# Altium PCB Powerboard.PcbDoc (part 1 of 2)
Units mm, origin at the board's own origin, x right, y up, seen from the top; angles counter-clockwise.
Board outline 74 x 33 mm, 4 copper layers (Top Layer, Layer 1, Layer 2, Bottom Layer), stack 1.17 mm thick; 86 components, 35 nets, 205 pads, 352 vias.
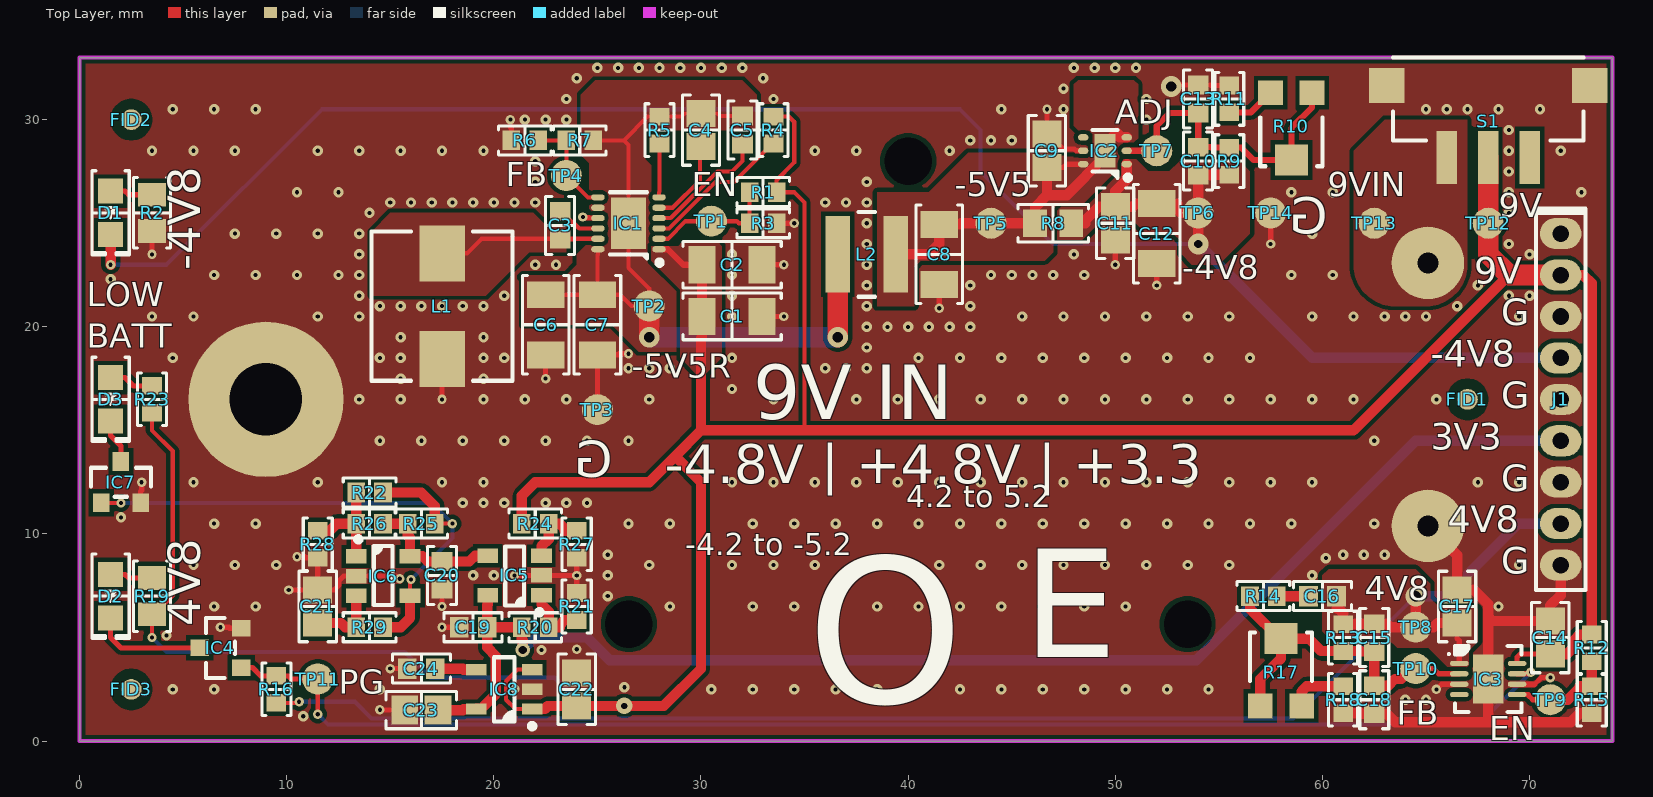
[diagram p0: Top Layer view]
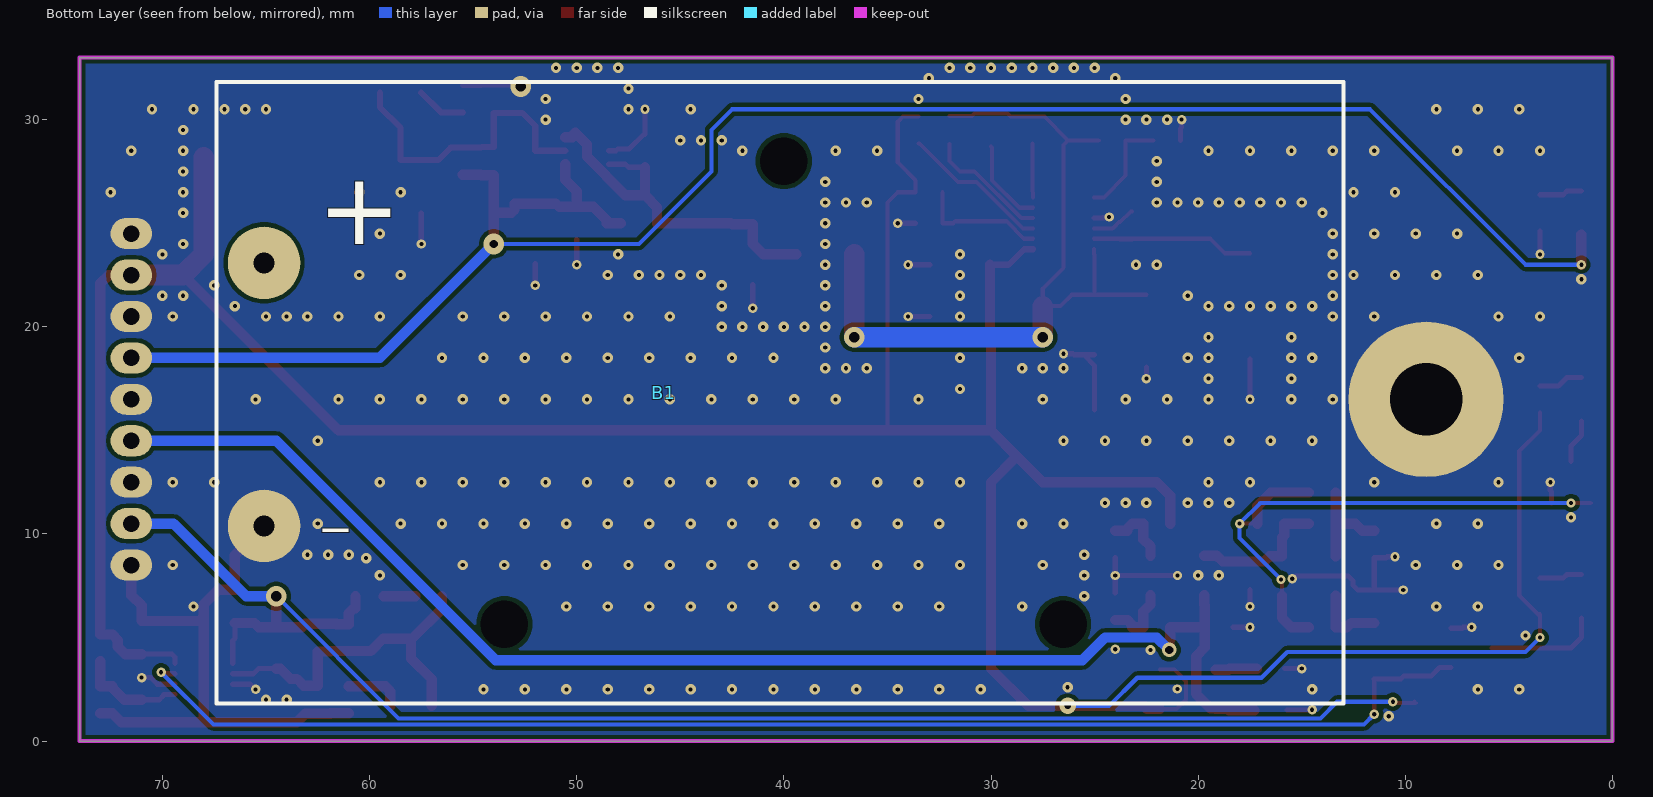
[diagram p1: Bottom Layer view, seen from below]
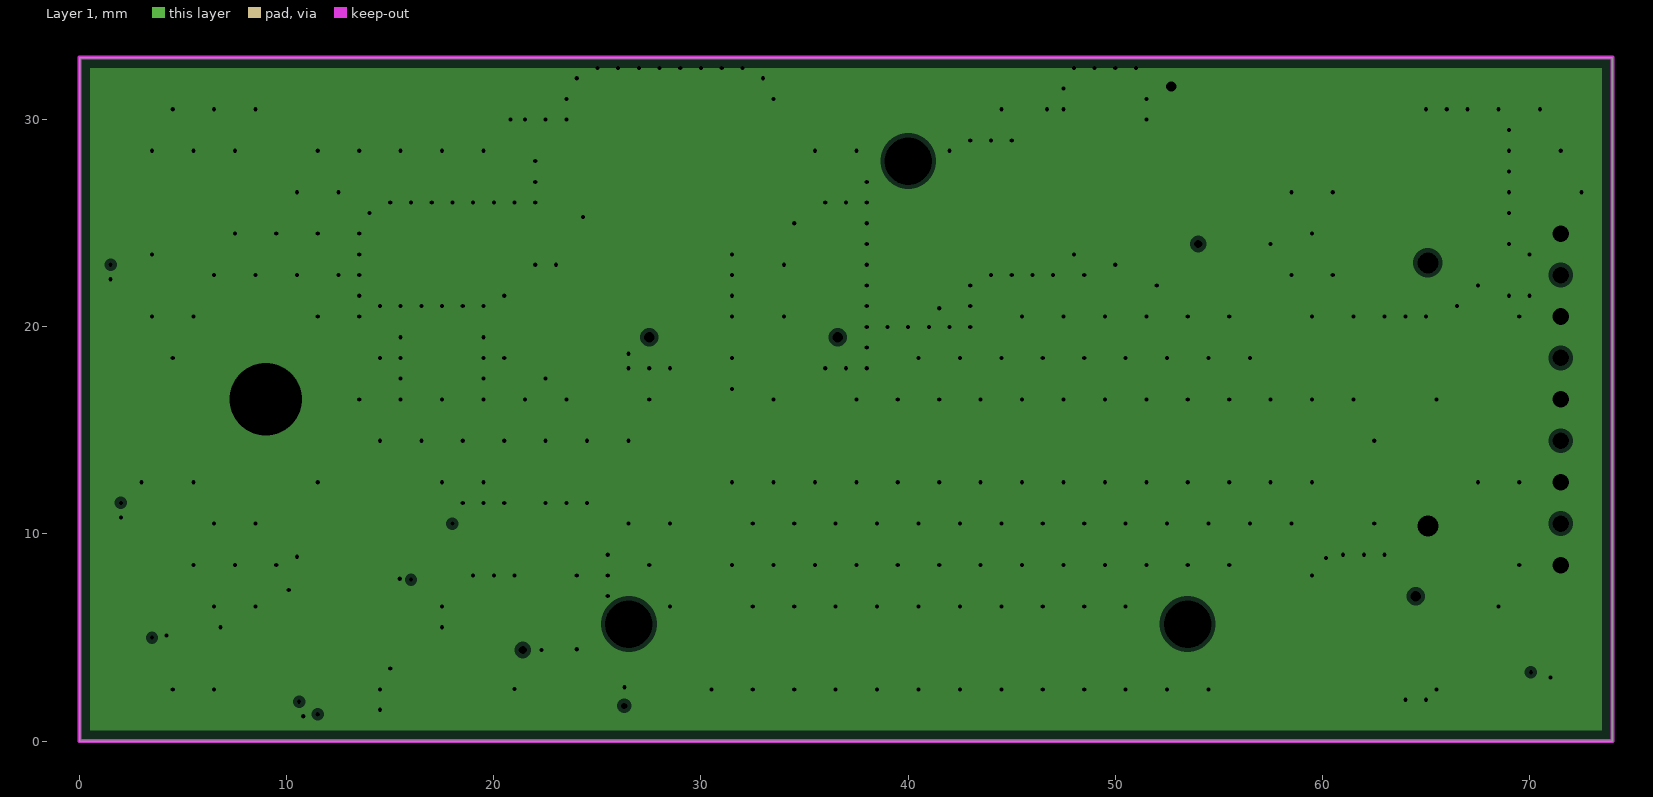
[diagram p2: Layer 1, clearances drawn from the general rule]
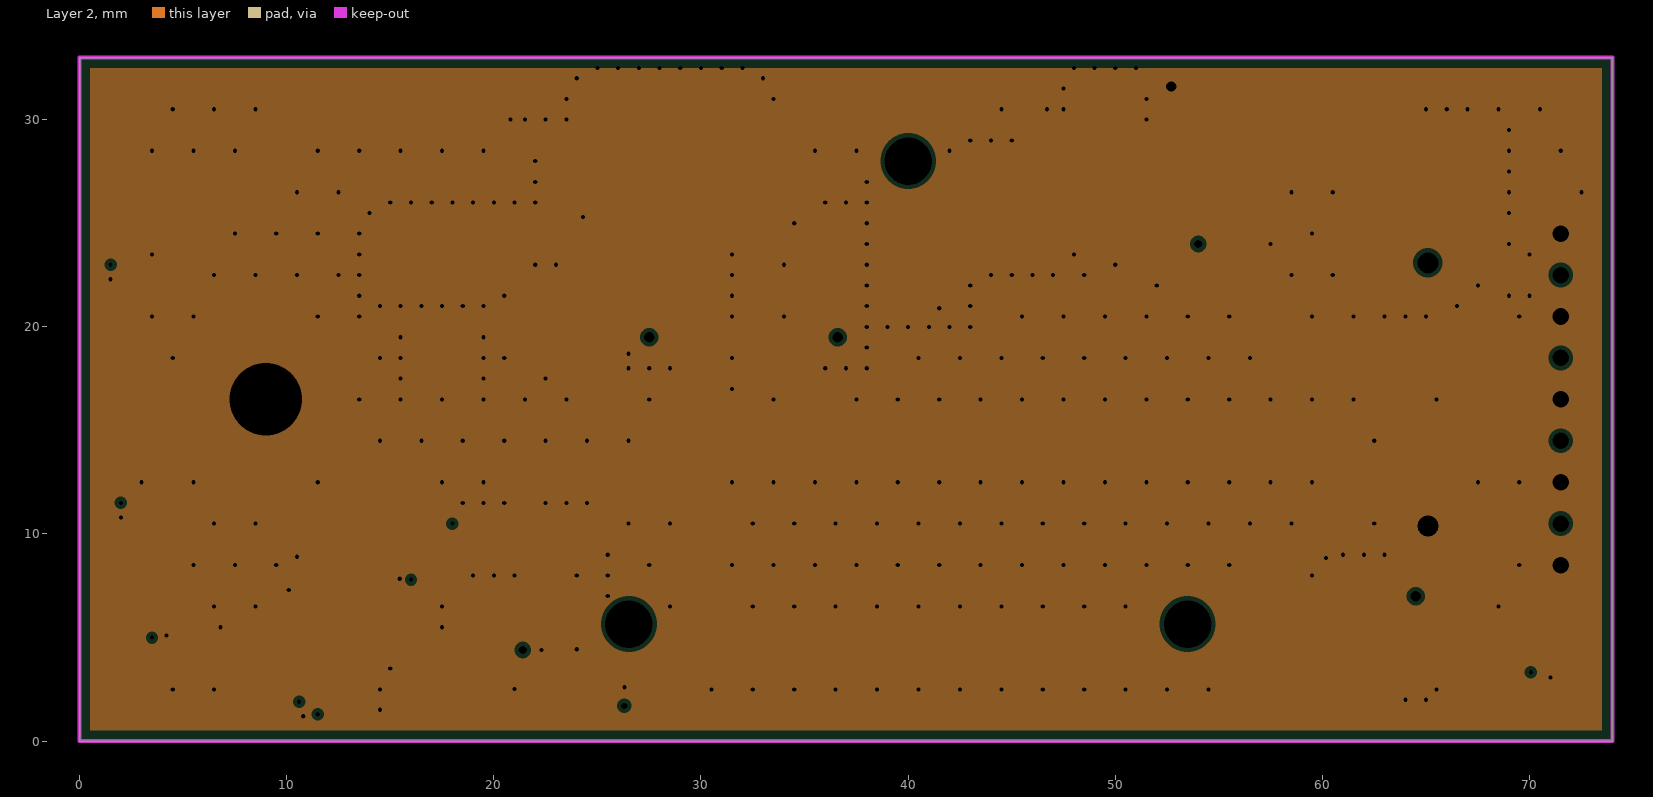
[diagram p3: Layer 2, clearances drawn from the general rule]
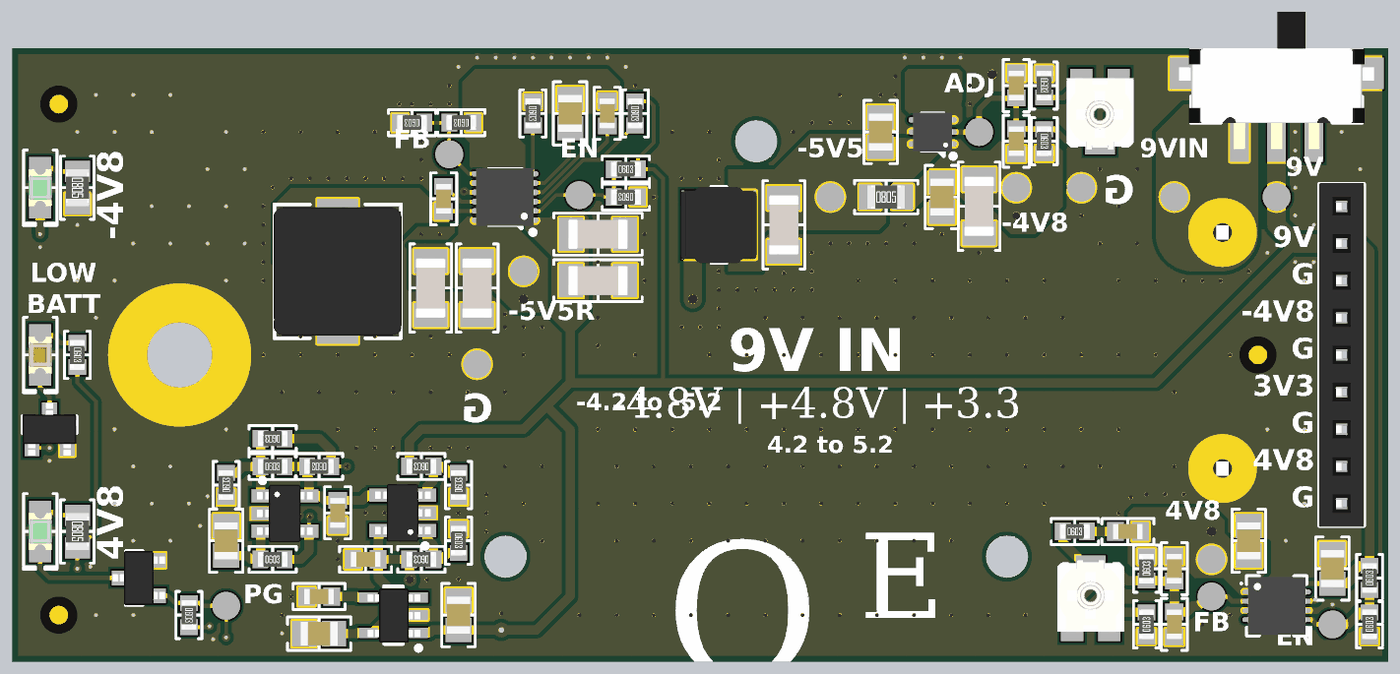
[diagram p4: 3D render of the assembled board from above, using the file's embedded part models]

## Layer stack, top to bottom
Top Solder: solder mask 0.0102, Solder Resist, Dk 3.5
Top Layer: signal copper 0.035
Prepreg1: prepreg 0.2, PP-006, Dk 4.6
Layer 1: plane copper 0.0175, net GND
Core: dielectric 0.665, FR-4, Dk 4.6
Layer 2: plane copper 0.0175, net GND
Prepreg2: prepreg 0.2, PP-006, Dk 4.6
Bottom Layer: signal copper 0.035
Bottom Solder: solder mask 0.0102, Solder Resist, Dk 3.5

## Board outline
0,0 0,33 74,33 74,0

## Design rules (kind name [scope] priority, off if disabled: settings)
BoardOutlineClearance [All] p1: gap=0.25 ignorepadtopadclearanceinfootprint=FALSE
Clearance "Clearance GND Poly" [InPolygon] p1: gap=0.2 ignorepadtopadclearanceinfootprint=TRUE
Clearance [All] p2: gap=0.09 ignorepadtopadclearanceinfootprint=FALSE
HoleSize [All] p1: absolutevalues=TRUE maxlimit=5 minlimit=0.2 maxpercent=80.000 minpercent=20.000
MinimumAnnularRing [All] p1: minimumring=0.125
MinimumSolderMaskSliver [All] p1: minsoldermaskwidth=0
PlaneClearance [All] p1: clearance=0.2
PlaneConnect [All] p1: planeconnectstyle=Direct reliefexpansion=0.508 reliefentries=4 reliefconductorwidth=0.254 reliefairgap=0.254
PolygonConnect [All] p1: connectstyle=Direct reliefconductorwidth=0.254 reliefentries=4 polygonreliefangle="90 Angle" airgapwidth=0.254
RoutingVias [All] p1: holewidth=0.35 width=0.65 viastyle="Through Hole" minholewidth=0.2 minwidth=0.45 maxholewidth=4 maxwidth=6.35
SMDEntry [All] p1: side=TRUE corner=TRUE anyangle=FALSE
SMDToCorner [All] p1: distance=39370
SilkToSilkClearance [All] p1: silktosilkclearance=-10
SolderMaskExpansion "SolderMask Via" [IsVia] p1: expansion=0.102 istentingtop=TRUE
SolderMaskExpansion [All] p2: expansion=0.102 istentingtop=FALSE
UnRoutedNet [All] p1: checkbadconnections=TRUE
Width [All] p1: maxlimit=3 minlimit=0.09 preferedwidth=0.2
24 further rules are at their usual default settings.

## Classes and differential pairs
component class Powersupply: B1 C19 C20 C21 C22 C23 C24 D3 FID1 FID2 FID3 IC5 IC6 IC7 IC8 J1 R20 R21 R22 R23 R24 R25 R26 R27 R28 R29 S1 TP12 TP13 TP14
component class PositiveRegulator: C14 C15 C16 C17 C18 D2 IC3 IC4 R12 R13 R14 R15 R16 R17 R18 R19 TP8 TP9 TP10 TP11
component class NegativeRegulator: C1 C2 C3 C4 C5 C6 C7 C8 C9 C10 C11 C12 C13 D1 IC1 IC2 L1 L2 R1 R2 R3 R4 R5 R6 R7 R8 R9 R10 R11 TP1 TP2 TP3 TP4 TP5 TP6 TP7

## Components (designator, comment, footprint, x,y, rotation, side; value= is the part's Value field where it differs from the comment)
B1 "BH9VPC" "MPD BH9VPC" 40.003,16.825 r180 bottom locked
C1 "10 µF" "CAP 1206_3216 - 0.8MM" 31.5,20.5 r180 top
C2 "1.5 µF" "CAP 1206_3216 - 0.8MM" 31.5,23 r180 top
C3 "0.1 µF" "CAP 0603_1608" 23.2,24.9 r90 top
C4 "2.2 µF" "CAP 0805_2012" 30,29.5 r270 top
C5 "5600 pF" "CAP 0603_1608" 32,29.5 r270 top
C6 "10 µF" "CAP 1206_3216 - 0.8MM" 22.5,20.1 r270 top
C7 "10 µF" "CAP 1206_3216 - 0.8MM" 25,20.1 r270 top
C8 "10 µF" "CAP 1206_3216 - 0.8MM" 41.5,23.5 r90 top
C9 "2.2 µF" "CAP 0805_2012" 46.7,28.5 r270 top
C10 "220 pF" "CAP 0603_1608" 54,28 r270 top
C11 "2.2 µF" "CAP 0805_2012" 50,25 r90 top
C12 "10 µF" "CAP 1206_3216 - 0.8MM" 52,24.5 r90 top
C13 "220 pF" "CAP 0603_1608" 54,31 r270 top
C14 "2.2 µF" "CAP 0805_2012" 71,5 r270 top
C15 "220 pF" "CAP 0603_1608" 62.5,5 r90 top
C16 "0.1 µF" "CAP 0603_1608" 60,7 r0 top
C17 "2.2 µF" "CAP 0805_2012" 66.5,6.5 r270 top
C18 "220 pF" "CAP 0603_1608" 62.5,2 r90 top
C19 "0.1 µF" "CAP 0603_1608" 19,5.5 r0 top
C20 "0.1 µF" "CAP 0603_1608" 17.5,8 r90 top
C21 "6.8 µF" "CAP 0805_2012" 11.5,6.5 r270 top
C22 "2.2 µF" "CAP 0805_2012" 24,2.5 r270 top
C23 "2.2 µF" "CAP 0805_2012" 16.5,1.5 r0 top
C24 "10000 pF" "CAP 0603_1608" 16.5,3.5 r0 top
D1 "Green" "LED 0805_2012 GREEN" 1.5,25.5 r270 top
D2 "Green" "LED 0805_2012 GREEN" 1.5,7 r270 top
D3 "Red" "LED 0805_2012 RED" 1.5,16.5 r270 top
FID1 "Fiducial" Fiducial-1mm 67,16.5 r90 top
FID2 "Fiducial" Fiducial-1mm 2.5,30 r90 top
FID3 "Fiducial" Fiducial-1mm 2.5,2.5 r90 top
IC1 "MAX17578ATC+" "MAXIM TDFN-12 3X3MM TD1233+1" 26.5,25 r180 top
IC2 "ADP7182ACPZN-R7" "AD LFCSP-6 2X2MM CP-6-3" 49.5,28.5 r180 top
IC3 "ADP7102ACPZ-R7" "AD LFCSP-8 3x3MM CP-8-5" 68,3 r0 top
IC4 "DMN2056U-7" "DIODES SOT-23-3" 6.8,4.5 r180 top
IC5 "AZV321KTR-G1" "DIODES SOT-23-5 K" 21,8 r180 top
IC6 "AZV321KTR-G1" "DIODES SOT-23-5 K" 14.656,7.967 r0 top
IC7 "DMN2056U-7" "DIODES SOT-23-3" 2,12.5 r90 top
IC8 "LP2985IM5X-3.3/NOPB" "TI SOT-23-5 DBV" 20.5,2.5 r180 top
J1 "NPPN091BFCN-RC" "SULLINS NPPN091BFCN" 71.5,16.5 r270 top
L1 "4.7 µH" "WURTH WE-HCI 7040" 17.5,21 r270 top
L2 "10 µH" "TAIYO YUDEN NR4018" 38,23.5 r0 top
R1 "3.32 MOhms" "RES 0603_1608" 33,26.5 r0 top
R2 "390 Ohms" "RES 0805_2012" 3.5,25.5 r270 top
R3 "845 kOhms" "RES 0603_1608" 33,25 r180 top
R4 "10 kOhms" "RES 0603_1608" 33.5,29.5 r270 top
R5 "23.7 kOhms" "RES 0603_1608" 28,29.5 r270 top
R6 "66.5 kOhms" "RES 0603_1608" 21.5,29 r180 top
R7 "13 kOhms" "RES 0603_1608" 24.15,29 r180 top
R8 "0 Ohms" "RES 0805_2012" 47,25 r0 top
R9 "294 kOhms" "RES 0603_1608" 55.5,28 r270 top
R10 "30 kOhms" "POT BOURNS TRIMPOT TC33" 58.5,29.5 r180 top
R11 "91 kOhms" "RES 0603_1608" 55.5,31 r270 top
R12 "100 kOhms" "RES 0603_1608" 73,4.5 r90 top
R13 "294 kOhms" "RES 0603_1608" 61,5 r90 top
R14 "13 kOhms" "RES 0603_1608" 57.15,7 r0 top
R15 "28.7 kOhms" "RES 0603_1608" 73,2 r90 top
R16 "100 kOhms" "RES 0603_1608" 9.5,2.5 r270 top
R17 "30 kOhms" "POT BOURNS TRIMPOT TC33" 58,3.5 r0 top
R18 "91 kOhms" "RES 0603_1608" 61,2 r90 top
R19 "976 Ohms" "RES 0805_2012" 3.5,7 r270 top
R20 "100 kOhms" "RES 0603_1608" 22,5.5 r180 top
R21 "100 kOhms" "RES 0603_1608" 24,6.5 r270 top
R22 "150 kOhms" "RES 0603_1608" 14,12 r180 top
R23 "931 Ohms" "RES 0603_1608" 3.5,16.5 r270 top
R24 "300 kOhms" "RES 0603_1608" 22,10.5 r180 top
R25 "1 kOhms" "RES 0603_1608" 16.5,10.5 r180 top
R26 "150 kOhms" "RES 0603_1608" 14,10.5 r0 top
R27 "100 kOhms" "RES 0603_1608" 24,9.5 r90 top
R28 "150 kOhms" "RES 0603_1608" 11.5,9.5 r90 top
R29 "100 kOhms" "RES 0603_1608" 14,5.5 r0 top
S1 "SS312SAH4-R" "NKK SS312SAH4" 68,31 r270 top
TP1 "Test Point" TestPoint-1.5mm 30.5,25.1 r180 top
TP2 "Test Point" TestPoint-1.5mm 27.5,21 r270 top
TP3 "Test Point" TestPoint-1.5mm 25,16 r270 top
TP4 "Test Point" TestPoint-1.5mm 23.5,27.3 r270 top
TP5 "Test Point" TestPoint-1.5mm 44,25 r270 top
TP6 "Test Point" TestPoint-1.5mm 54,25.5 r270 top
TP7 "Test Point" TestPoint-1.5mm 52,28.5 r270 top
TP8 "Test Point" TestPoint-1.5mm 64.5,5.5 r90 top
TP9 "Test Point" TestPoint-1.5mm 71,2 r90 top
TP10 "Test Point" TestPoint-1.5mm 64.5,3.5 r90 top
TP11 "Test Point" TestPoint-1.5mm 11.5,3 r90 top
TP12 "Test Point" TestPoint-1.5mm 68,25 r90 top
TP13 "Test Point" TestPoint-1.5mm 62.5,25 r90 top
TP14 "Test Point" TestPoint-1.5mm 57.5,25.5 r90 top

## Footprints (in the part's own frame and the unit in brackets; to place one, negate y for a bottom-side part, rotate by r counter-clockwise, add the part's x,y. Pads: shape width x height; smd on the part's side, far side on the other; paste and mask are expansions set on the pad)
"AD LFCSP-6 2X2MM CP-6-3" [mm] "LFCSP, 6-Lead Lead Frame Chip Scale Package [LFCSP]  2.00 x 2.00 mm Body and 0.55 mm Package Height"
  oval 0.5x0.3 smd: 1(-1.05,0.65) 2(-1.05,0) 3(-1.05,-0.65) 4(1.05,-0.65) 5(1.05,0) 6(1.05,0.65)
  rect 1x1.6 smd: 7(0,0)
  silkscreen extent -1.23,-1 0.6,1.42, body extent -1.06,-1.05 1.06,1.05, height 0.6
"AD LFCSP-8 3x3MM CP-8-5" [mm] "SON, 8-Leads, Body 3.00x3.00mm, Pitch 0.50mm, Thermal Pad 2.36x1.49mm, IPC Medium Density"
  oval 0.9x0.25 smd: 1(-1.395,0.75) 2(-1.395,0.25) 3(-1.395,-0.25) 4(-1.395,-0.75) 5(1.395,-0.75) 6(1.395,-0.25) 7(1.395,0.25) 8(1.395,0.75)
  rect 1.49x2.36 smd: 9(0,0)
  silkscreen extent -1.95,-1.6 1.6,1.6, body extent -1.57,-1.55 1.57,1.55, height 0.8
"CAP 0603_1608" [mm] "Chip Capacitor, 2-Leads, Body 1.60x0.80mm, IPC Medium Density"
  rect 0.9x1 smd: 1(-0.675,0) 2(0.675,0)
  silkscreen extent -1.4,-0.7 1.4,0.7, body extent -0.8,-0.41 0.8,0.41, height 0.82
"CAP 0805_2012" [mm] "Chip Capacitor, 2-Leads, Body 2.00x1.20mm, IPC Medium Density"
  rect 1.3x1.4 smd: 1(-0.8,0) 2(0.8,0)
  silkscreen extent -1.7,-0.9 1.7,0.9, body extent -1,-0.64 1,0.64, height 1.26
"CAP 1206_3216 - 0.8MM" [mm] "Chip Capacitor, 2-Leads, Body 3.25x1.60mm, IPC Medium Density"
  rect 1.3x1.8 smd: 1(-1.45,0) 2(1.45,0)
  silkscreen extent -2.37,-1.12 2.37,1.12, body extent -1.6,-0.8 1.6,0.8, height 0.8
"DIODES SOT-23-3" [mm] "SOT23, 3-Leads, Body 2.90x2.40mm, Pitch 0.95mm, IPC Medium Density"
  rect 0.9x0.8 smd: 1(-1,0.95) 2(-1,-0.95) 3(1,0)
  silkscreen extent -0.7,-1.45 0.7,1.45, body extent -1.41,-1.45 1.41,1.45, height 1.5
"DIODES SOT-23-5 K" [mm] "SOT23, 5-Leads, Body 3.00x2.85mm, Pitch 0.95mm, IPC Medium Density"
  rect 1x0.7 smd: 1(-1.3,0.95) 2(-1.3,0) 3(-1.3,-0.95) 4(1.3,-0.95) 5(1.3,0.95)
  silkscreen extent -1.33,-1.4 0.45,1.9, body extent -1.5,-1.55 1.5,1.55, height 1.45
Fiducial-1mm [mm]
  round 1 smd paste-1 mask+0.5: F(0,0)
  Top Layer pour cut-out: -1,0 -0.924,0.383 -0.707,0.707 -0.383,0.924 0,1 0,1 0.383,0.924 0.707,0.707 0.924,0.383 1,0 1,0 0.924,-0.383 0.707,-0.707 0.383,-0.924 0,-1 0,-1 -0.383,-0.924 -0.707,-0.707 -0.924,-0.383 -1,0
"LED 0805_2012 GREEN" [mm] "Chip Diode, 2-Leads, Body 2.00x1.25mm, IPC Medium Density"
  rect 1.2x1.2 smd: 1(-1.05,0) 2(1.05,0)
  silkscreen extent -2.03,-0.9 2.03,0.9, body extent -1,-0.62 1,0.63, height 0.9
"LED 0805_2012 RED" [mm] "Chip Diode, 2-Leads, Body 2.00x1.25mm, IPC Medium Density"
  rect 1.2x1.2 smd: 1(-1.05,0) 2(1.05,0)
  silkscreen extent -2.03,-0.9 2.03,0.9, body extent -1,-0.62 1,0.63, height 0.9
"MAXIM TDFN-12 3X3MM TD1233+1" [mm] "DFN, 12-Leads, Body 3.00x3.00mm, Pitch 0.50mm, Thermal Pad 1.70x2.50mm"
  oval 0.65x0.3 smd: 1(-1.475,1.25) 2(-1.475,0.75) 3(-1.475,0.25) 4(-1.475,-0.25) 5(-1.475,-0.75) 6(-1.475,-1.25) 7(1.475,-1.25) 8(1.475,-0.75) 9(1.475,-0.25) 10(1.475,0.25) 11(1.475,0.75) 12(1.475,1.25)
  rect 1.7x2.5 smd: 13(0,0)
  silkscreen extent -1.63,-1.5 0.9,2.02, body extent -1.56,-1.55 1.56,1.55, height 0.8
"MPD BH9VPC" [mm]
  round 3.5 hole 1.016 unplated: 1(-25.087,6.265) 2(-25.087,-6.435)
  rect 0x0 hole 2.29 unplated: M(-13.487,-11.175) M(0.003,11.175) M(13.483,-11.175)
  silkscreen extent -27.39,-15 27.01,15, body extent -27.31,-14.99 27.04,14.98, height 20.62
"NKK SS312SAH4" [mm]
  rect 2.55x1 smd: 1(2.825,-2) 2(2.825,0) 3(2.825,2)
  rect 1.7x1.7 smd: M(-0.65,4.9) M(-0.65,-4.9)
  silkscreen extent -2,-4.6 2,4.6, body extent -3.98,-5.25 3.42,5.25, height 2.9
"POT BOURNS TRIMPOT TC33" [mm] "Bourns Trimpot TC33X-1 - Open Frame 3mm x 3.8mm x 1.2mm"
  rect 1.2x1.2 smd: 1(-1,-1.8) 3(1,-1.8)
  rect 1.6x1.5 smd: 2(0,1.45)
  silkscreen extent -1.5,-0.6 1.5,1.75, body extent -1.8,-1.91 1.8,1.95, height 1.15
"RES 0603_1608" [mm] "Chip Resistor, 2-Leads, Body 1.60x0.80mm, IPC Medium Density"
  rect 0.85x0.95 smd: 1(-0.65,0) 2(0.65,0)
  silkscreen extent -1.27,-0.7 1.27,0.7, body extent -0.8,-0.4 0.8,0.4, height 0.45
"RES 0805_2012" [mm] "Chip Resistor, 2-Leads, Body 2.00x1.25mm, IPC Medium Density"
  rect 1.15x1.35 smd: 1(-0.875,0) 2(0.875,0)
  silkscreen extent -1.7,-0.9 1.7,0.9, body extent -1,-0.62 1,0.63, height 0.6
"SULLINS NPPN091BFCN" [mm]
  oval 1.5x2 hole 0.8: 1(-8,0) 2(-6,0) 3(-4,0) 4(-2,0) 5(0,0) 6(2,0) 7(4,0) 8(6,0) 9(8,0)
  silkscreen extent -9.2,-1.2 9.2,1.2, body extent -9.25,-1.2 9.25,1.2, height 4.41
"TAIYO YUDEN NR4018" [mm] "Power Inductor, 2-Leads,Taiyo Yuden, NR4018T100M"
  rect 1.2x3.7 smd: 1(-1.4,0) 2(1.4,0)
  silkscreen extent -0.4,-2.05 0.4,2.05, body extent -2.05,-2.05 2.05,2.05, height 1.8
TestPoint-1.5mm [mm]
  round 1.5 smd: 1(0,0)
"TI SOT-23-5 DBV" [mm] "SOT23, 5-Leads, Body 2.90x2.80mm, Pitch 0.95mm, IPC Medium Density"
  rect 1x0.55 smd: 1(-1.35,0.95) 2(-1.35,0) 3(-1.35,-0.95) 4(1.35,-0.95) 5(1.35,0.95)
  silkscreen extent -1.48,-1.55 0.5,1.9, body extent -1.44,-1.43 1.39,1.48, height 1.5
"WURTH WE-HCI 7040" [mm]
  rect 2.7x2.2 smd: 1(-2.55,0) 2(2.55,0)
  silkscreen extent -3.6,-3.4 3.6,3.4, body extent -3.49,-3.45 3.49,3.45, height 4

## Part data
B1: "BATT HOLDER 9V 1 CELL PC PIN", Manufacturer="MPD (Memory Protection Devices)", Supplier Part Number 1=BH9V-PC-ND, Battery Cell Size=9V, Battery Type, Function="9V, Holder", ComponentLink1Description=Datasheet, ComponentLink1URL=http://www.memoryprotectiondevices.com/datasheets/BH9VPC-datasheet.pdf, ComponentLink2Description="DigiKey Link", ComponentLink2URL=https://www.digikey.com/en/products/detail/mpd-memory-protection-devices/BH9VPC/31510, Height Above Board="0.812\" (20.62mm)", LastUpdated="16/06/2022 08:46:57", Lifecycle Status=Active, Minimum Order=1, Mounting Type="PCB, Through Hole", Number of Cells=1, Packaging=Bulk, Part Number=BH9VPC, Part Status=Active, PartId=3, Price=1.07, Series=-, Style="Holder (Open)", Supplier 1=DigiKey, Termination Style="PC Pin"
C1 C6 C7 C8 C12: library part GMK316BJ106KL-T, "CAP CER 10UF 35V X5R 1206", Device Package="1206 (3216 Metric)", Manufacturer="Taiyo Yuden", Operating Temperature="-55°C ~ 85°C", Supplier Part Number 1=587-2484-1-ND, Temperature Coefficient=X5R, Tolerance=±10%, Voltage - Rated=35V, Applications="SMPS Filtering", Capacitance="10 µF", ComponentLink1Description=Datasheet, ComponentLink1URL=https://www.yuden.co.jp/productdata/catalog/mlcc01_e.pdf, ComponentLink2Description="DigiKey Link", ComponentLink2URL=https://www.digikey.com/en/products/detail/taiyo-yuden/GMK316BJ106KL-T/2217972, LastUpdated="19/06/2022 07:55:19", Lifecycle Status=Active, Minimum Order=1, Mounting Type="Surface Mount, MLCC", Package / Case="1206 (3216 Metric)", Packaging=TapeAndReel, Part Number=GMK316BJ106KL-T, Part Status=Active, PartId=41658, Price=0.07, Series=M, Size / Dimension="0.126\" L x 0.063\" W (3.20mm x 1.60mm)", Supplier 1=DigiKey, Thickness (Max)="0.071\" (1.80mm)"
C2: library part C1206C155K4RAC7800, "CAP CER 1.5UF 16V X7R 1206", Device Package="1206 (3216 Metric)", Manufacturer=KEMET, Operating Temperature="-55°C ~ 125°C", Supplier Part Number 1=399-C1206C155K4RAC7800CT-ND, Temperature Coefficient=X7R, Tolerance=±10%, Voltage - Rated=16V, Applications="Bypass, Decoupling", Capacitance="1.5 µF", ComponentLink1Description=Datasheet, ComponentLink1URL=https://connect.kemet.com:7667/gateway/IntelliData-ComponentDocumentation/1.0/download/datasheet/C1206C155K4RACTU, ComponentLink2Description="DigiKey Link", ComponentLink2URL=https://www.digikey.com/en/products/detail/kemet/C1206C155K4RAC7800/2215304, LastUpdated="19/06/2022 07:54:29", Lifecycle Status=Active, Minimum Order=1, Mounting Type="Surface Mount, MLCC", Package / Case="1206 (3216 Metric)", Packaging=TapeAndReel, Part Number=C1206C155K4RAC7800, Part Status=Active, PartId=41318, Price=0.08, Series="SMD Comm X7R", Size / Dimension="0.126\" L x 0.063\" W (3.20mm x 1.60mm)", Supplier 1=DigiKey, Thickness (Max)="0.043\" (1.10mm)"
C3 C16 C19 C20: library part CL10B104KO8NNNC, "CAP CER 0.1UF 16V X7R 0603", Device Package="0603 (1608 Metric)", Manufacturer="Samsung Electro-Mechanics", Operating Temperature="-55°C ~ 125°C", Supplier Part Number 1=1276-1005-1-ND, Temperature Coefficient=X7R, Tolerance=±10%, Voltage - Rated=16V, Applications="General Purpose", Capacitance="0.1 µF", ComponentLink1Description=Datasheet, ComponentLink1URL=http://www.samsungsem.com/kr/support/product-search/mlcc/CL10B104KO8NNNC.jsp, ComponentLink2Description="DigiKey Link", ComponentLink2URL=https://www.digikey.com/en/products/detail/samsung-electro-mechanics/CL10B104KO8NNNC/3886663, LastUpdated="19/06/2022 07:49:08", Lifecycle Status=Active, Minimum Order=1, Mounting Type="Surface Mount, MLCC", Package / Case="0603 (1608 Metric)", Packaging=TapeAndReel, Part Number=CL10B104KO8NNNC, Part Status=Active, PartId=9791, Price=0.01, Series=CL, Size / Dimension="0.063\" L x 0.031\" W (1.60mm x 0.80mm)", Supplier 1=DigiKey, Thickness (Max)="0.035\" (0.90mm)"
C4 C9 C11 C14 C17 C22 C23: library part GRM21BR71E225KE11L, "CAP CER 2.2UF 25V X7R 0805", Device Package="0805 (2012 Metric)", Manufacturer="Murata Electronics", Operating Temperature="-55°C ~ 125°C", Supplier Part Number 1=490-14467-1-ND, Temperature Coefficient=X7R, Tolerance=±10%, Voltage - Rated=25V, Applications="General Purpose", Capacitance="2.2 µF", ComponentLink1Description=Datasheet, ComponentLink1URL=https://search.murata.co.jp/Ceramy/image/img/A01X/G101/ENG/GRM21BR71E225KE11-01.pdf, ComponentLink2Description="DigiKey Link", ComponentLink2URL=https://www.digikey.com/en/products/detail/murata-electronics/GRM21BR71E225KE11L/6606096, LastUpdated="19/06/2022 07:52:39", Lifecycle Status=Active, Minimum Order=1, Mounting Type="Surface Mount, MLCC", Package / Case="0805 (2012 Metric)", Packaging=TapeAndReel, Part Number=GRM21BR71E225KE11L, Part Status=Active, PartId=7355, Price=0.03, Series=GRM, Size / Dimension="0.079\" L x 0.049\" W (2.00mm x 1.25mm)", Supplier 1=DigiKey, Thickness (Max)="0.055\" (1.40mm)"
C5: library part C0603C562K5RAC7867, "CAP CER 5600PF 50V X7R 0603", Device Package="0603 (1608 Metric)", Manufacturer=KEMET, Operating Temperature="-55°C ~ 125°C", Supplier Part Number 1=399-C0603C562K5RAC7867CT-ND, Temperature Coefficient=X7R, Tolerance=±10%, Voltage - Rated=50V, Applications="Bypass, Decoupling", Capacitance="5600 pF", ComponentLink1Description=Datasheet, ComponentLink1URL=https://api.kemet.com/component-edge/download/datasheet/C0603C562K5RACTU.pdf, ComponentLink2Description="DigiKey Link", ComponentLink2URL=https://www.digikey.com/en/products/detail/kemet/C0603C562K5RAC7867/2201004, LastUpdated="19/06/2022 07:48:25", Lifecycle Status=Active, Minimum Order=1, Mounting Type="Surface Mount, MLCC", Package / Case="0603 (1608 Metric)", Packaging=TapeAndReel, Part Number=C0603C562K5RAC7867, Part Status=Active, PartId=35437, Price=0.01, Series="SMD Comm X7R", Size / Dimension="0.063\" L x 0.031\" W (1.60mm x 0.80mm)", Supplier 1=DigiKey, Thickness (Max)="0.034\" (0.87mm)"
C10 C13 C15 C18: library part CC0603JRNPO8BN221, "CAP CER 220PF 25V C0G/NPO 0603", Device Package="0603 (1608 Metric)", Manufacturer=Yageo, Operating Temperature="-55°C ~ 125°C", Supplier Part Number 1=311-3953-1-ND, Temperature Coefficient="C0G, NP0", Tolerance=±5%, Voltage - Rated=25V, Applications="General Purpose", Capacitance="220 pF", ComponentLink1Description=Datasheet, ComponentLink1URL=https://www.yageo.com/upload/media/product/productsearch/datasheet/mlcc/UPY-GP_NP0_16V-to-50V_17.pdf, ComponentLink2Description="DigiKey Link", ComponentLink2URL=https://www.digikey.com/en/products/detail/yageo/CC0603JRNPO8BN221/5883593, LastUpdated="19/06/2022 07:49:09", Lifecycle Status=Active, Minimum Order=1, Mounting Type="Surface Mount, MLCC", Package / Case="0603 (1608 Metric)", Packaging=TapeAndReel, Part Number=CC0603JRNPO8BN221, Part Status=Active, PartId=9530, Price=0.01, Series=CC, Size / Dimension="0.063\" L x 0.031\" W (1.60mm x 0.80mm)", Supplier 1=DigiKey, Thickness (Max)="0.035\" (0.90mm)"
C21: library part CGA4J1X7R0J685M125AC, "CAP CER 6.8UF 6.3V X7R 0805", Device Package="0805 (2012 Metric)", Manufacturer="TDK Corporation", Operating Temperature="-55°C ~ 125°C", Ratings=AEC-Q200, Supplier Part Number 1=445-12778-1-ND, Temperature Coefficient=X7R, Tolerance=±20%, Voltage - Rated=6.3V, Applications=Automotive, Capacitance="6.8 µF", ComponentLink1Description=Datasheet, ComponentLink1URL=https://product.tdk.com/info/en/catalog/datasheets/mlcc_automotive_general_en.pdf?ref_disty=digikey, ComponentLink2Description="DigiKey Link", ComponentLink2URL=https://www.digikey.com/en/products/detail/tdk-corporation/CGA4J1X7R0J685M125AC/3950014, LastUpdated="20/06/2022 12:00:49", Lifecycle Status=Active, Minimum Order=1, Mounting Type="Surface Mount, MLCC", Package / Case="0805 (2012 Metric)", Packaging=TapeAndReel, Part Number=CGA4J1X7R0J685M125AC, Part Status=Active, PartId=40932, Price=0.08, Series=CGA, Size / Dimension="0.079\" L x 0.049\" W (2.00mm x 1.25mm)", Supplier 1=DigiKey, Thickness (Max)="0.057\" (1.45mm)"
C24: library part 0603B103K500CT, "CAP CER 10000PF 50V X7R 0603", Device Package="0603 (1608 Metric)", Manufacturer="Walsin Technology Corporation", Operating Temperature="-55°C ~ 125°C", Supplier Part Number 1=1292-1386-1-ND, Temperature Coefficient=X7R, Tolerance=±10%, Voltage - Rated=50V, Applications="General Purpose", Capacitance="10000 pF", ComponentLink1Description=Datasheet, ComponentLink1URL=http://www.passivecomponent.com/wp-content/uploads/2018/10/MLCC.pdf, ComponentLink2Description="DigiKey Link", ComponentLink2URL=https://www.digikey.com/en/products/detail/walsin-technology-corporation/0603B103K500CT/9354883, LastUpdated="20/06/2022 11:57:59", Lifecycle Status=Active, Minimum Order=1, Mounting Type="Surface Mount, MLCC", Package / Case="0603 (1608 Metric)", Packaging=TapeAndReel, Part Number=0603B103K500CT, Part Status=Active, PartId=16999, Price=0.01, Series=-, Size / Dimension="0.063\" L x 0.031\" W (1.60mm x 0.80mm)", Supplier 1=DigiKey, Thickness (Max)="0.034\" (0.87mm)"
D1 D2: library part APHCM2012CGCK-F01, "LED GREEN CLEAR CHIP SMD", Current - Test=20mA, Device Package="0805 (2012 Metric)", Lens Color=Colorless, Manufacturer=Kingbright, Millicandela Rating=50mcd, Supplier Device Package="Chip LED", Supplier Part Number 1=754-1094-1-ND, Voltage - Forward (Vf) (Typ)=2.1V, Color=Green, ComponentLink1Description=Datasheet, ComponentLink1URL=http://www.kingbrightusa.com/images/catalog/SPEC/APHCM2012CGCK-F01.pdf, ComponentLink2Description="DigiKey Link", ComponentLink2URL=https://www.digikey.com/en/products/detail/kingbright/APHCM2012CGCK-F01/1747492, Configuration=Standard, Height (Max)=0.40mm, LastUpdated="20/06/2022 12:31:45", Lens Size="1.30mm x 1.25mm", Lens Style="Rectangle with Flat Top", Lens Transparency=Clear, Lifecycle Status=Active, Minimum Order=1, Mounting Type="Surface Mount", Package / Case="0805 (2012 Metric)", Packaging=TapeAndReel, Part Number=APHCM2012CGCK-F01, Part Status=Active, PartId=241, Price=0.06, Series=-, Size / Dimension="2.00mm L x 1.25mm W", Supplier 1=DigiKey, Viewing Angle=110°, Wavelength - Dominant=570nm, Wavelength - Peak=574nm
D3: library part APT2012SURCK, "LED RED CLEAR CHIP SMD", Current - Test=20mA, Device Package="0805 (2012 Metric)", Lens Color=Colorless, Manufacturer=Kingbright, Millicandela Rating=80mcd, Supplier Device Package="Chip LED", Supplier Part Number 1=754-1133-1-ND, Voltage - Forward (Vf) (Typ)=1.95V, Color=Red, ComponentLink1Description=Datasheet, ComponentLink1URL=http://www.kingbrightusa.com/images/catalog/SPEC/APT2012SURCK.pdf, ComponentLink2Description="DigiKey Link", ComponentLink2URL=https://www.digikey.com/en/products/detail/kingbright/APT2012SURCK/1747532, Configuration=Standard, Height (Max)=0.75mm, LastUpdated="20/06/2022 12:31:40", Lens Size="1.30mm x 1.25mm", Lens Style="Rectangle with Flat Top", Lens Transparency=Clear, Lifecycle Status=Active, Minimum Order=1, Mounting Type="Surface Mount", Package / Case="0805 (2012 Metric)", Packaging=TapeAndReel, Part Number=APT2012SURCK, Part Status=Active, PartId=356, Price=0.05, Series=-, Size / Dimension="2.00mm L x 1.25mm W", Supplier 1=DigiKey, Viewing Angle=120°, Wavelength - Dominant=630nm, Wavelength - Peak=645nm
FID1 FID2 FID3: library part CMP-002-000000-1, Component Type=Standard, Design Item ID=Fiducial, Pin Count=0, Source=Fiducial.SchLib
IC1: "4.5V TO 60V, 1A HIGH-EFFICIENCY,", Current - Output=1A, Frequency - Switching="400kHz ~ 2.2MHz", Manufacturer="Analog Devices Inc./Maxim Integrated", Operating Temperature="-40°C ~ 125°C (TA)", Supplier Device Package="12-TDFN (3x3)", Supplier Part Number 1=175-MAX17578ATC+-ND, Voltage - Input (Max)=24V, Voltage - Input (Min)=4.5V, Voltage - Output (Max)=-36V, Voltage - Output (Min/Fixed)=-0.9V, ComponentLink1Description=Datasheet, ComponentLink1URL=https://datasheets.maximintegrated.com/en/ds/MAX17577-MAX17578.pdf, ComponentLink2Description="DigiKey Link", ComponentLink2URL=https://www.digikey.com/en/products/detail/analog-devices-inc-maxim-integrated/MAX17578ATC/13592869, Function=Ratiometric, LastUpdated="20/06/2022 10:51:56", Lifecycle Status=Active, Minimum Order=1, Mounting Type="Surface Mount", Number of Outputs=1, Output Configuration=Negative, Output Type=Adjustable, Packaging=Tray, Part Number=MAX17578ATC+, Part Status=Active, Price=2.51, Series=Himalaya, Supplier 1=DigiKey, Synchronous Rectifier=Yes, Topology=Buck
IC2: "IC REG LIN NEG ADJ 200MA 6LFCSP", Current - Output=200mA, Current - Quiescent (Iq)="53 µA", Current - Supply (Max)="850 µA", Manufacturer="Analog Devices Inc.", Operating Temperature="-40°C ~ 125°C", Package / Case="6-UDFN Exposed Pad", Supplier Device Package="6-LFCSP-UD (2x2)", Supplier Part Number 1=505-ADP7182ACPZN-R7CT-ND, Voltage - Input (Max)=-28V, Voltage - Output (Max)=-27.64V, Voltage - Output (Min/Fixed)=-1.22V, Voltage Dropout (Max)="0.36V @ 200mA", ComponentLink1Description=Datasheet, ComponentLink1URL=https://www.analog.com/media/en/technical-documentation/data-sheets/ADP7182.pdf, ComponentLink2Description="DigiKey Link", ComponentLink2URL=https://www.digikey.com/en/products/detail/analog-devices-inc/ADP7182ACPZN-R7/5011553, Control Features=Enable, LastUpdated="16/06/2022 08:45:05", Lifecycle Status=Active, Minimum Order=1, Mounting Type="Surface Mount", Number of Regulators=1, Output Configuration=Negative, Output Type=Adjustable, Packaging=TapeAndReel, Part Number=ADP7182ACPZN-R7, Part Status=Active, Price=2.56, Protection Features="Over Current, Over Temperature", PSRR="66dB ~ 45dB (10kHz ~ 1MHz)", Series=-, Supplier 1=DigiKey
IC3: "IC REG LIN POS ADJ 300MA 8LFCSP", Current - Output=300mA, Current - Quiescent (Iq)="900 µA", Current - Supply (Max)="1.4 mA", Manufacturer="Analog Devices Inc.", Operating Temperature="-40°C ~ 125°C", Package / Case="8-WFDFN Exposed Pad, CSP", Supplier Device Package="8-LFCSP-WD (3x3)", Supplier Part Number 1=505-ADP7102ACPZ-R7CT-ND, Voltage - Input (Max)=20V, Voltage - Output (Max)=19.675V, Voltage - Output (Min/Fixed)=1.22V, Voltage Dropout (Max)="0.325V @ 300mA", ComponentLink1Description=Datasheet, ComponentLink1URL=https://www.analog.com/media/en/technical-documentation/data-sheets/ADP7102.pdf, ComponentLink2Description="DigiKey Link", ComponentLink2URL=https://www.digikey.com/en/products/detail/analog-devices-inc/ADP7102ACPZ-R7/3043434, Control Features="Enable, Power Good, Under Voltage Lockout", LastUpdated="20/06/2022 12:50:21", Lifecycle Status=Active, Minimum Order=1, Mounting Type="Surface Mount", Number of Regulators=1, Output Configuration=Positive, Output Type=Adjustable, Packaging=TapeAndReel, Part Number=ADP7102ACPZ-R7, Part Status=Active, Price=2.42, Protection Features="Over Current, Over Temperature, Reverse Polarity", PSRR="80dB ~ 50dB (10kHz ~ 100kHz)", Series=-, Supplier 1=DigiKey
IC4 IC7: "MOSFET N-CHANNEL 20V 4A SOT23-3", Current - Continuous Drain (Id) @ 25°C="4A (Ta)", Drain to Source Voltage (Vdss)="20 V", Drive Voltage (Max Rds On,  Min Rds On)="1.5V, 4.5V", Input Capacitance (Ciss) (Max) @ Vds="339 pF @ 10 V", Manufacturer="Diodes Incorporated", Operating Temperature="-55°C ~ 150°C (TJ)", Package / Case="TO-236-3, SC-59, SOT-23-3", Power Dissipation (Max)=940mW, Supplier Device Package=SOT-23-3, Supplier Part Number 1=DMN2056U-7DICT-ND, ComponentLink1Description=Datasheet, ComponentLink1URL=https://www.diodes.com/assets/Datasheets/DMN2056U.pdf, ComponentLink2Description="DigiKey Link", ComponentLink2URL=https://www.digikey.com/en/products/detail/diodes-incorporated/DMN2056U-7/7352909, FET Type=N-Channel, Gate Charge (Qg) (Max) @ Vgs="4.3 nC @ 4.5 V", LastUpdated="20/06/2022 12:38:07", Lifecycle Status=Active, Minimum Order=1, Mounting Type="Surface Mount", Packaging=TapeAndReel, Part Number=DMN2056U-7, Part Status=Active, Price=0.09, Rds On (Max) @ Id, Vgs="38mOhm @ 3.6A, 4.5V", Series=-, Supplier 1=DigiKey, Technology="MOSFET (Metal Oxide)", Vgs (Max)=±8V, Vgs(th) (Max) @ Id="1V @ 250µA"
IC5 IC6: "IC OPAMP GP 1 CIRCUIT SOT23-5", Current - Input Bias="250 nA", Current - Output / Channel="160 mA", Current - Supply=130µA, Manufacturer="Diodes Incorporated", Operating Temperature="-40°C ~ 85°C", Package / Case="SC-74A, SOT-753", Supplier Device Package=SOT-23-5, Supplier Part Number 1=AZV321KTR-G1DICT-ND, Voltage - Input Offset="1.7 mV", Voltage - Supply, Single/Dual (±)="2.7V ~ 5.5V", Amplifier Type="General Purpose", ComponentLink1Description=Datasheet, ComponentLink1URL=https://www.diodes.com/assets/Datasheets/AZV321.pdf, ComponentLink2Description="DigiKey Link", ComponentLink2URL=https://www.digikey.com/en/products/detail/diodes-incorporated/AZV321KTR-G1/4471050, Gain Bandwidth Product="1 MHz", LastUpdated="21/06/2022 12:26:19", Lifecycle Status=Active, Minimum Order=1, Mounting Type="Surface Mount", Number of Circuits=1, Output Type=Rail-to-Rail, Packaging=TapeAndReel, Part Number=AZV321KTR-G1, Part Status=Active, PartId=42, Price=0.11, Series=-, Slew Rate=1V/µs, Supplier 1=DigiKey
IC8: "IC REG LINEAR 3.3V 150MA SOT23-5", Current - Output=150mA, Current - Quiescent (Iq)="95 µA", Current - Supply (Max)="2.5 mA", Manufacturer="Texas Instruments", Operating Temperature="-40°C ~ 125°C", Package / Case="SC-74A, SOT-753", Supplier Device Package=SOT-23-5, Supplier Part Number 1=LP2985IM5X-3.3/NOPBCT-ND, Voltage - Input (Max)=16V, Voltage - Output (Min/Fixed)=3.3V, Voltage Dropout (Max)="0.58V @ 150mA", ComponentLink1Description=Datasheet, ComponentLink1URL=http://www.ti.com/general/docs/suppproductinfo.tsp?distId=10&gotoUrl=http%3A%2F%2Fwww.ti.com%2Flit%2Fgpn%2Flp2985-n, ComponentLink2Description="DigiKey Link", ComponentLink2URL=https://www.digikey.com/en/products/detail/texas-instruments/LP2985IM5X-3-3-NOPB/367679, Control Features=Enable, LastUpdated="21/06/2022 13:01:53", Lifecycle Status=Active, Minimum Order=1, Mounting Type="Surface Mount", Number of Regulators=1, Output Configuration=Positive, Output Type=Fixed, Packaging=TapeAndReel, Part Number=LP2985IM5X-3.3/NOPB, Part Status=Active, Price=0.45, Protection Features="Over Current, Over Temperature, Short Circuit", PSRR="45dB (1kHz)", Series=-, Supplier 1=DigiKey
J1: "CONN HDR 9POS 0.079 GOLD PCB", Current Rating (Amps)=2A, Insulation Color=Black, Manufacturer="Sullins Connector Solutions", Material Flammability Rating="UL94 V-0", Operating Temperature="-40°C ~ 105°C", Supplier Part Number 1=S5751-09-ND, ComponentLink1Description=Datasheet, ComponentLink1URL=https://drawings-pdf.s3.amazonaws.com/10483.pdf, ComponentLink2Description="DigiKey Link", ComponentLink2URL=https://www.digikey.com/en/products/detail/sullins-connector-solutions/NPPN091BFCN-RC/804811, Connector Type=Header, Contact Finish - Mating=Gold, Contact Finish - Post=Gold, Contact Finish Thickness - Mating=Flash, Contact Length - Post="0.094\" (2.40mm)", Contact Type="Female Socket", Fastening Type=Push-Pull, Insulation Height="0.173\" (4.40mm)", LastUpdated="21/06/2022 14:44:10", Lifecycle Status=Active, Minimum Order=1, Mounting Type="Through Hole", Number of Positions=9, Number of Positions Loaded=All, Number of Rows=1, Packaging=Tube, Part Number=NPPN091BFCN-RC, Part Status=Active, Pitch - Mating="0.079\" (2.00mm)", Price=0.46, Series=-, Style="Board to Board", Supplier 1=DigiKey, Termination=Solder
L1: library part 744311470, "FIXED IND 4.7UH 6A 19.5 MOHM SMD", Current - Saturation=7A, Current Rating (Amps)="6 A", DC Resistance (DCR)=19.5mOhm, Device Package=Nonstandard, Frequency - Self Resonant=33MHz, Inductance Frequency - Test="100 kHz", Manufacturer="Würth Elektronik", Operating Temperature="-40°C ~ 150°C", Ratings=AEC-Q200, Supplier Device Package=7040, Supplier Part Number 1=732-1153-1-ND, Tolerance=±20%, ComponentLink1Description=Datasheet, ComponentLink1URL=https://katalog.we-online.de/pbs/datasheet/744311470.pdf, ComponentLink2Description="DigiKey Link", ComponentLink2URL=https://www.digikey.com/en/products/detail/würth-elektronik/744311470/1638558, Height - Seated (Max)="0.157\" (4.00mm)", Inductance="4.7 µH", LastUpdated="19/06/2022 08:35:18", Lifecycle Status=Active, Material - Core=Nonstandard, Minimum Order=1, Mounting Type="Surface Mount", Package / Case=Nonstandard, Packaging=TapeAndReel, Part Number=744311470, Part Status=Active, PartId=258, Price=2.72, Series=WE-HCI, Shielding=Shielded, Size / Dimension="0.276\" L x 0.272\" W (7.00mm x 6.90mm)", Supplier 1=DigiKey, Type=Wirewound
L2: library part NR4018T100M, "FIXED IND 10UH 840MA 216MOHM SMD", Current - Saturation=1.2A, Current Rating (Amps)="840 mA", DC Resistance (DCR)="216mOhm Max", Device Package=Nonstandard, Frequency - Self Resonant=24MHz, Inductance Frequency - Test="100 kHz", Manufacturer="Taiyo Yuden", Operating Temperature="-25°C ~ 120°C", Supplier Part Number 1=587-1664-1-ND, Tolerance=±20%, ComponentLink1Description=Datasheet, ComponentLink1URL=https://www.yuden.co.jp/productdata/catalog/wound04_e.pdf, ComponentLink2Description="DigiKey Link", ComponentLink2URL=https://www.digikey.com/en/products/detail/taiyo-yuden/NR4018T100M/958047, Height - Seated (Max)="0.071\" (1.80mm)", Inductance="10 µH", LastUpdated="19/06/2022 08:48:28", Lifecycle Status=Active, Material - Core=Ferrite, Minimum Order=1, Mounting Type="Surface Mount", Package / Case=Nonstandard, Packaging=TapeAndReel, Part Number=NR4018T100M, Part Status=Active, PartId=3644, Price=0.14, Series=NR, Shielding=Shielded, Size / Dimension="0.157\" L x 0.157\" W (4.00mm x 4.00mm)", Supplier 1=DigiKey, Type="Drum Core, Wirewound"
R1: library part RC0603FR-073M32L, "RES 3.32M OHM 1% 1/10W 0603", Device Package="0603 (1608 Metric)", Manufacturer=Yageo, Operating Temperature="-55°C ~ 155°C", Power (Watts)="0.1W, 1/10W", Supplier Device Package=0603, Supplier Part Number 1=13-RC0603FR-073M32LCT-ND, Temperature Coefficient=±100ppm/°C, Tolerance=±1%, ComponentLink1Description=Datasheet, ComponentLink1URL=https://www.yageo.com/upload/media/product/productsearch/datasheet/rchip/PYu-RC_Group_51_RoHS_L_11.pdf, ComponentLink2Description="DigiKey Link", ComponentLink2URL=https://www.digikey.com/en/products/detail/yageo/RC0603FR-073M32L/5918333, Composition="Thick Film", Features="Moisture Resistant", Height - Seated (Max)="0.022\" (0.55mm)", LastUpdated="19/06/2022 08:07:05", Lifecycle Status=Active, Minimum Order=1, Number of Terminations=2, Package / Case="0603 (1608 Metric)", Packaging=CutTape, Part Number=RC0603FR-073M32L, Part Status=Active, PartId=62044, Price=0.01, Resistance="3.32 MOhms", Series=RC_L, Size / Dimension="0.063\" L x 0.031\" W (1.60mm x 0.80mm)", Supplier 1=DigiKey
R2: library part CRG0805F390R, "RES SMD 390 OHM 1% 1/8W 0805", Device Package="0805 (2012 Metric)", Manufacturer="TE Connectivity Passive Product", Operating Temperature="-55°C ~ 155°C", Power (Watts)="0.125W, 1/8W", Supplier Device Package=0805, Supplier Part Number 1=A126365CT-ND, Temperature Coefficient=±100ppm/°C, Tolerance=±1%, ComponentLink1Description=Datasheet, ComponentLink1URL=https://www.te.com/commerce/DocumentDelivery/DDEController?Action=srchrtrv&DocNm=1773204&DocType=DS&DocLang=English, ComponentLink2Description="DigiKey Link", ComponentLink2URL=https://www.digikey.com/en/products/detail/te-connectivity-passive-product/CRG0805F390R/2380897, Composition="Thick Film", Height - Seated (Max)="0.026\" (0.65mm)", LastUpdated="20/06/2022 12:21:16", Lifecycle Status=Active, Minimum Order=1, Number of Terminations=2, Package / Case="0805 (2012 Metric)", Packaging=TapeAndReel, Part Number=CRG0805F390R, Part Status=Active, PartId=46128, Price=0.01, Resistance="390 Ohms", Series="CRG, Neohm", Size / Dimension="0.079\" L x 0.049\" W (2.00mm x 1.25mm)", Supplier 1=DigiKey
R3: library part RC0603FR-07845KL, "RES 845K OHM 1% 1/10W 0603", Device Package="0603 (1608 Metric)", Manufacturer=Yageo, Operating Temperature="-55°C ~ 155°C", Power (Watts)="0.1W, 1/10W", Supplier Device Package=0603, Supplier Part Number 1=311-845KHRCT-ND, Temperature Coefficient=±100ppm/°C, Tolerance=±1%, ComponentLink1Description=Datasheet, ComponentLink1URL=https://www.yageo.com/upload/media/product/productsearch/datasheet/rchip/PYu-RC_Group_51_RoHS_L_10.pdf, ComponentLink2Description="DigiKey Link", ComponentLink2URL=https://www.digikey.com/en/products/detail/yageo/RC0603FR-07845KL/727410, Composition="Thick Film", Features="Moisture Resistant", Height - Seated (Max)="0.022\" (0.55mm)", LastUpdated="19/06/2022 08:07:49", Lifecycle Status=Active, Minimum Order=1, Number of Terminations=2, Package / Case="0603 (1608 Metric)", Packaging=CutTape, Part Number=RC0603FR-07845KL, Part Status=Active, PartId=22882, Price=0.01, Resistance="845 kOhms", Series=RC_L, Size / Dimension="0.063\" L x 0.031\" W (1.60mm x 0.80mm)", Supplier 1=DigiKey
R4: library part RC0603FR-0710KL, "RES 10K OHM 1% 1/10W 0603", Device Package="0603 (1608 Metric)", Manufacturer=Yageo, Operating Temperature="-55°C ~ 155°C", Power (Watts)="0.1W, 1/10W", Supplier Device Package=0603, Supplier Part Number 1=311-10.0KHRCT-ND, Temperature Coefficient=±100ppm/°C, Tolerance=±1%, ComponentLink1Description=Datasheet, ComponentLink1URL=https://www.yageo.com/upload/media/product/productsearch/datasheet/rchip/PYu-RC_Group_51_RoHS_L_10.pdf, ComponentLink2Description="DigiKey Link", ComponentLink2URL=https://www.digikey.com/en/products/detail/yageo/RC0603FR-0710KL/726880, Composition="Thick Film", Features="Moisture Resistant", Height - Seated (Max)="0.022\" (0.55mm)", LastUpdated="19/06/2022 08:07:51", Lifecycle Status=Active, Minimum Order=1, Number of Terminations=2, Package / Case="0603 (1608 Metric)", Packaging=CutTape, Part Number=RC0603FR-0710KL, Part Status=Active, PartId=22599, Price=0.01, Resistance="10 kOhms", Series=RC_L, Size / Dimension="0.063\" L x 0.031\" W (1.60mm x 0.80mm)", Supplier 1=DigiKey
R5: library part RC0603FR-0723K7L, "RES 23.7K OHM 1% 1/10W 0603", Device Package="0603 (1608 Metric)", Manufacturer=Yageo, Operating Temperature="-55°C ~ 155°C", Power (Watts)="0.1W, 1/10W", Supplier Device Package=0603, Supplier Part Number 1=311-23.7KHRCT-ND, Temperature Coefficient=±100ppm/°C, Tolerance=±1%, ComponentLink1Description=Datasheet, ComponentLink1URL=https://www.yageo.com/upload/media/product/productsearch/datasheet/rchip/PYu-RC_Group_51_RoHS_L_10.pdf, ComponentLink2Description="DigiKey Link", ComponentLink2URL=https://www.digikey.com/en/products/detail/yageo/RC0603FR-0723K7L/727070, Composition="Thick Film", Features="Moisture Resistant", Height - Seated (Max)="0.022\" (0.55mm)", LastUpdated="19/06/2022 08:08:17", Lifecycle Status=Active, Minimum Order=1, Number of Terminations=2, Package / Case="0603 (1608 Metric)", Packaging=CutTape, Part Number=RC0603FR-0723K7L, Part Status=Active, PartId=12444, Price=0.01, Resistance="23.7 kOhms", Series=RC_L, Size / Dimension="0.063\" L x 0.031\" W (1.60mm x 0.80mm)", Supplier 1=DigiKey
R6: library part ERJ-3EKF6652V, "RES SMD 66.5K OHM 1% 1/10W 0603", Device Package="0603 (1608 Metric)", Manufacturer="Panasonic Electronic Components", Operating Temperature="-55°C ~ 155°C", Power (Watts)="0.1W, 1/10W", Ratings=AEC-Q200, Supplier Device Package=0603, Supplier Part Number 1=P66.5KHCT-ND, Temperature Coefficient=±100ppm/°C, Tolerance=±1%, ComponentLink1Description=Datasheet, ComponentLink1URL=https://industrial.panasonic.com/cdbs/www-data/pdf/RDA0000/AOA0000C304.pdf, ComponentLink2Description="DigiKey Link", ComponentLink2URL=https://www.digikey.com/en/products/detail/panasonic-electronic-components/ERJ-3EKF6652V/196444, Composition="Thick Film", Features="Automotive AEC-Q200", Height - Seated (Max)="0.022\" (0.55mm)", LastUpdated="19/06/2022 08:07:29", Lifecycle Status=Active, Minimum Order=1, Number of Terminations=2, Package / Case="0603 (1608 Metric)", Packaging=TapeAndReel, Part Number=ERJ-3EKF6652V, Part Status=Active, PartId=26116, Price=0.01, Resistance="66.5 kOhms", Series=ERJ-3EK, Size / Dimension="0.063\" L x 0.031\" W (1.60mm x 0.80mm)", Supplier 1=DigiKey
R7: library part ERJ-3GEYJ133V, "RES SMD 13K OHM 5% 1/10W 0603", Device Package="0603 (1608 Metric)", Manufacturer="Panasonic Electronic Components", Operating Temperature="-55°C ~ 155°C", Power (Watts)="0.1W, 1/10W", Ratings=AEC-Q200, Supplier Device Package=0603, Supplier Part Number 1=P13KGCT-ND, Temperature Coefficient=±200ppm/°C, Tolerance=±5%, ComponentLink1Description=Datasheet, ComponentLink1URL=http://industrial.panasonic.com/www-cgi/jvcr13pz.cgi?E+PZ+3+AOA0001+ERJ3GEYJ133V+7+WW, ComponentLink2Description="DigiKey Link", ComponentLink2URL=https://www.digikey.com/en/products/detail/panasonic-electronic-components/ERJ-3GEYJ133V/135680, Composition="Thick Film", Features="Automotive AEC-Q200", Height - Seated (Max)="0.022\" (0.55mm)", LastUpdated="19/06/2022 08:08:01", Lifecycle Status=Active, Minimum Order=1, Number of Terminations=2, Package / Case="0603 (1608 Metric)", Packaging=TapeAndReel, Part Number=ERJ-3GEYJ133V, Part Status=Active, PartId=19318, Price=0.01, Resistance="13 kOhms", Series=ERJ-3G, Size / Dimension="0.063\" L x 0.031\" W (1.60mm x 0.80mm)", Supplier 1=DigiKey
R8: library part RC0805JR-7W0RL, "RES 0 OHM JUMPER 1/4W 0805", Device Package="0805 (2012 Metric)", Manufacturer=Yageo, Operating Temperature="-55°C ~ 155°C", Power (Watts)="0.25W, 1/4W", Supplier Device Package=0805, Supplier Part Number 1=13-RC0805JR-7W0RLCT-ND, Tolerance=Jumper, ComponentLink1Description=Datasheet, ComponentLink1URL=https://www.yageo.com/upload/media/product/productsearch/datasheet/rchip/PYu-RC_Group_51_RoHS_L_11.pdf, ComponentLink2Description="DigiKey Link", ComponentLink2URL=https://www.digikey.com/en/products/detail/yageo/RC0805JR-7W0RL/12698815, Composition="Thick Film", Features="Moisture Resistant", Height - Seated (Max)="0.024\" (0.60mm)", LastUpdated="20/06/2022 12:20:32", Lifecycle Status=Active, Minimum Order=1, Number of Terminations=2, Package / Case="0805 (2012 Metric)", Packaging=TapeAndReel, Part Number=RC0805JR-7W0RL, Part Status=Active, PartId=67008, Price=0.01, Resistance="0 Ohms", Series=RC_L, Size / Dimension="0.079\" L x 0.049\" W (2.00mm x 1.25mm)", Supplier 1=DigiKey
R9 R13: library part ERA-3AEB2943V, "RES SMD 294K OHM 0.1% 1/10W 0603", Device Package="0603 (1608 Metric)", Manufacturer="Panasonic Electronic Components", Operating Temperature="-55°C ~ 155°C", Power (Watts)="0.1W, 1/10W", Ratings=AEC-Q200, Supplier Device Package=0603, Supplier Part Number 1=P294KDBCT-ND, Temperature Coefficient=±25ppm/°C, Tolerance=±0.1%, ComponentLink1Description=Datasheet, ComponentLink1URL=https://industrial.panasonic.com/cdbs/www-data/pdf/RDM0000/AOA0000C307.pdf, ComponentLink2Description="DigiKey Link", ComponentLink2URL=https://www.digikey.com/en/products/detail/panasonic-electronic-components/ERA-3AEB2943V/2026969, Composition="Thin Film", Features="Automotive AEC-Q200", Height - Seated (Max)="0.022\" (0.55mm)", LastUpdated="19/06/2022 08:07:50", Lifecycle Status=Active, Minimum Order=1, Number of Terminations=2, Package / Case="0603 (1608 Metric)", Packaging=TapeAndReel, Part Number=ERA-3AEB2943V, Part Status=Active, PartId=22652, Price=0.04, Resistance="294 kOhms", Series=ERA-3A, Size / Dimension="0.063\" L x 0.031\" W (1.60mm x 0.80mm)", Supplier 1=DigiKey
R10 R17: library part TC33X-2-303E, "TRIMMER 30K OHM 0.1W J LEAD TOP", Manufacturer="Bourns Inc.", Power (Watts)="0.1W, 1/10W", Resistive Material=Cermet, Supplier Part Number 1=TC33X-2-303ECT-ND, Temperature Coefficient=±250ppm/°C, Tolerance=±25%, Adjustment Type="Top Adjustment", ComponentLink1Description=Datasheet, ComponentLink1URL=https://www.bourns.com/docs/Product-Datasheets/TC33.pdf, ComponentLink2Description="DigiKey Link", ComponentLink2URL=https://www.digikey.com/en/products/detail/bourns-inc/TC33X-2-303E/2566895, LastUpdated="20/06/2022 12:32:03", Lifecycle Status=Active, Minimum Order=1, Mounting Type="Surface Mount", Number of Turns=1, Packaging=TapeAndReel, Part Number=TC33X-2-303E, Part Status=Active, PartId=15, Price=0.11, Resistance="30 kOhms", Series="Trimpot® TC33 - Open Frame", Size / Dimension="Rectangular - 0.150\" x 0.142\" Face x 0.047\" H (3.80mm x 3.60mm x 1.20mm)", Supplier 1=DigiKey, Termination Style="J Lead"
R11 R18: library part RC0603FR-0791KL, "RES 91K OHM 1% 1/10W 0603", Device Package="0603 (1608 Metric)", Manufacturer=Yageo, Operating Temperature="-55°C ~ 155°C", Power (Watts)="0.1W, 1/10W", Supplier Device Package=0603, Supplier Part Number 1=311-91.0KHRCT-ND, Temperature Coefficient=±100ppm/°C, Tolerance=±1%, ComponentLink1Description=Datasheet, ComponentLink1URL=https://www.yageo.com/upload/media/product/productsearch/datasheet/rchip/PYu-RC_Group_51_RoHS_L_10.pdf, ComponentLink2Description="DigiKey Link", ComponentLink2URL=https://www.digikey.com/en/products/detail/yageo/RC0603FR-0791KL/727428, Composition="Thick Film", Features="Moisture Resistant", Height - Seated (Max)="0.022\" (0.55mm)", LastUpdated="20/06/2022 12:10:33", Lifecycle Status=Active, Minimum Order=1, Number of Terminations=2, Package / Case="0603 (1608 Metric)", Packaging=CutTape, Part Number=RC0603FR-0791KL, Part Status=Active, PartId=7596, Price=0.01, Resistance="91 kOhms", Series=RC_L, Size / Dimension="0.063\" L x 0.031\" W (1.60mm x 0.80mm)", Supplier 1=DigiKey
R12 R16 R20 R21 R27 R29: library part RS73F1JTTD1003B, "RES 100K OHM 0.1% 1/5W 0603", Device Package="0603 (1608 Metric)", Manufacturer="KOA Speer Electronics, Inc.", Operating Temperature="-55°C ~ 155°C", Power (Watts)="0.2W, 1/5W", Ratings=AEC-Q200, Supplier Device Package=0603, Supplier Part Number 1=2019-RS73F1JTTD1003BCT-ND, Temperature Coefficient=±25ppm/°C, Tolerance=±0.1%, ComponentLink1Description=Datasheet, ComponentLink1URL=http://www.koaspeer.com/pdfs/RS73.pdf, ComponentLink2Description="DigiKey Link", ComponentLink2URL=https://www.digikey.com/en/products/detail/koa-speer-electronics-inc/RS73F1JTTD1003B/11594402, Composition="Thick Film", Features="Automotive AEC-Q200, Moisture Resistant", Height - Seated (Max)="0.022\" (0.55mm)", LastUpdated="19/06/2022 08:07:20", Lifecycle Status=Active, Minimum Order=1, Number of Terminations=2, Package / Case="0603 (1608 Metric)", Packaging=TapeAndReel, Part Number=RS73F1JTTD1003B, Part Status=Active, PartId=56386, Price=0.08, Resistance="100 kOhms", Series=RS73, Size / Dimension="0.063\" L x 0.031\" W (1.60mm x 0.80mm)", Supplier 1=DigiKey
R14: library part RMCF0603FT13K0, "RES 13K OHM 1% 1/10W 0603", Device Package="0603 (1608 Metric)", Manufacturer="Stackpole Electronics Inc", Operating Temperature="-55°C ~ 155°C", Power (Watts)="0.1W, 1/10W", Ratings=AEC-Q200, Supplier Device Package=0603, Supplier Part Number 1=RMCF0603FT13K0CT-ND, Temperature Coefficient=±100ppm/°C, Tolerance=±1%, ComponentLink1Description=Datasheet, ComponentLink1URL=https://www.seielect.com/catalog/sei-rmcf_rmcp.pdf, ComponentLink2Description="DigiKey Link", ComponentLink2URL=https://www.digikey.com/en/products/detail/stackpole-electronics-inc/RMCF0603FT13K0/1761291, Composition="Thick Film", Features="Automotive AEC-Q200", Height - Seated (Max)="0.022\" (0.55mm)", LastUpdated="20/06/2022 12:10:26", Lifecycle Status=Active, Minimum Order=1, Number of Terminations=2, Package / Case="0603 (1608 Metric)", Packaging=CutTape, Part Number=RMCF0603FT13K0, Part Status=Active, PartId=10642, Price=0.01, Resistance="13 kOhms", Series=RMCF, Size / Dimension="0.061\" L x 0.031\" W (1.55mm x 0.80mm)", Supplier 1=DigiKey
R15: library part RC0603FR-0728K7L, "RES 28.7K OHM 1% 1/10W 0603", Device Package="0603 (1608 Metric)", Manufacturer=Yageo, Operating Temperature="-55°C ~ 155°C", Power (Watts)="0.1W, 1/10W", Supplier Device Package=0603, Supplier Part Number 1=311-28.7KHRCT-ND, Temperature Coefficient=±100ppm/°C, Tolerance=±1%, ComponentLink1Description=Datasheet, ComponentLink1URL=https://www.yageo.com/upload/media/product/productsearch/datasheet/rchip/PYu-RC_Group_51_RoHS_L_10.pdf, ComponentLink2Description="DigiKey Link", ComponentLink2URL=https://www.digikey.com/en/products/detail/yageo/RC0603FR-0728K7L/727110, Composition="Thick Film", Features="Moisture Resistant", Height - Seated (Max)="0.022\" (0.55mm)", LastUpdated="20/06/2022 12:10:21", Lifecycle Status=Active, Minimum Order=1, Number of Terminations=2, Package / Case="0603 (1608 Metric)", Packaging=CutTape, Part Number=RC0603FR-0728K7L, Part Status=Active, PartId=12499, Price=0.01, Resistance="28.7 kOhms", Series=RC_L, Size / Dimension="0.063\" L x 0.031\" W (1.60mm x 0.80mm)", Supplier 1=DigiKey
R19: library part RC0805FR-07976RL, "RES 976 OHM 1% 1/8W 0805", Device Package="0805 (2012 Metric)", Manufacturer=Yageo, Operating Temperature="-55°C ~ 155°C", Power (Watts)="0.125W, 1/8W", Supplier Device Package=0805, Supplier Part Number 1=311-976CRCT-ND, Temperature Coefficient=±100ppm/°C, Tolerance=±1%, ComponentLink1Description=Datasheet, ComponentLink1URL=https://www.yageo.com/upload/media/product/productsearch/datasheet/rchip/PYu-RC_Group_51_RoHS_L_10.pdf, ComponentLink2Description="DigiKey Link", ComponentLink2URL=https://www.digikey.com/en/products/detail/yageo/RC0805FR-07976RL/728214, Composition="Thick Film", Features="Moisture Resistant", Height - Seated (Max)="0.024\" (0.60mm)", LastUpdated="20/06/2022 12:21:47", Lifecycle Status=Active, Minimum Order=1, Number of Terminations=2, Package / Case="0805 (2012 Metric)", Packaging=TapeAndReel, Part Number=RC0805FR-07976RL, Part Status=Active, PartId=36922, Price=0.01, Resistance="976 Ohms", Series=RC_L, Size / Dimension="0.079\" L x 0.049\" W (2.00mm x 1.25mm)", Supplier 1=DigiKey